# Altium PCB PCB1.PcbDoc (part 2 of 3)
Units mil, origin at the board's own origin, x right, y up, seen from the top; angles counter-clockwise.
Board outline 8430 x 1950 mil, 4 copper layers (Top Layer, VCC, GND, Bottom Layer); 357 components, 242 nets, 1572 pads, 599 vias.
Unrouted connection lines stored in the file: 1.
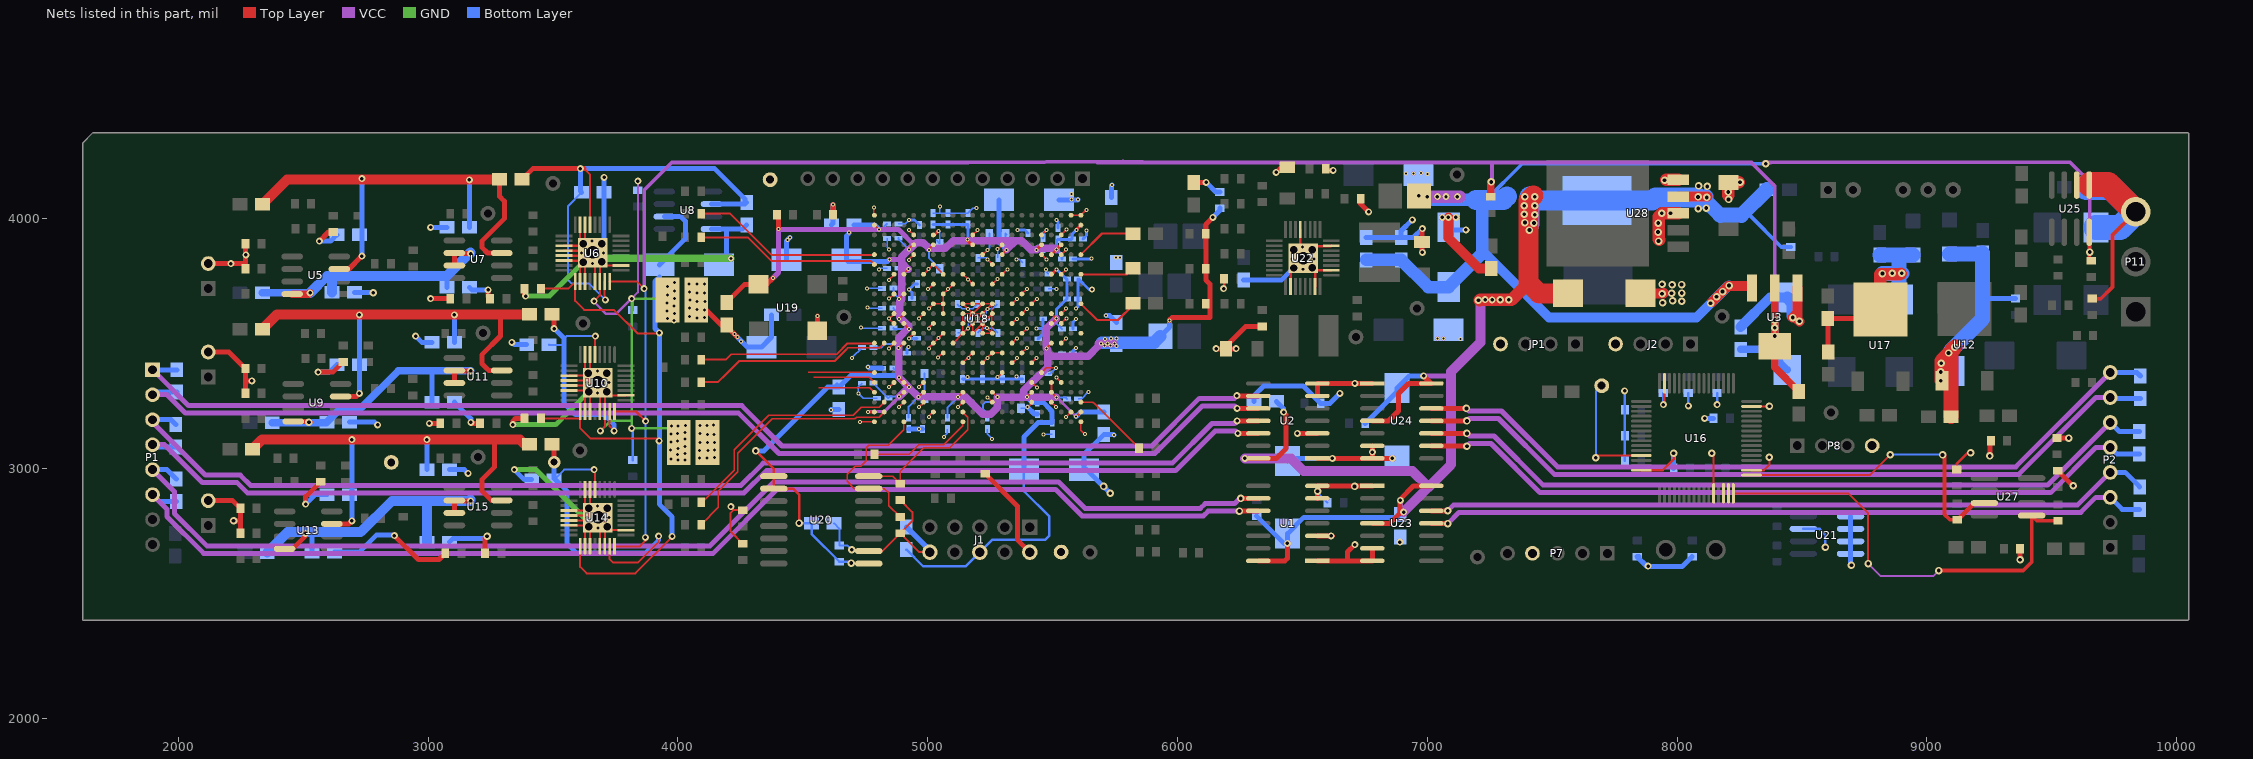
[diagram p4: the nets of this part, all layers, seen from the top]

## Via types
v1: diameter 16, hole 8, Top Layer to Bottom Layer, 223 vias
v2: diameter 30, hole 15, Top Layer to Bottom Layer, 157 vias
v3: diameter 28, hole 14, Top Layer to Bottom Layer, 154 vias
v4: diameter 24, hole 12, Top Layer to Bottom Layer, 60 vias
v5: diameter 196.85, hole 118.11, Top Layer to Bottom Layer, 4 vias
v6: diameter 50, hole 28, Top Layer to Bottom Layer, 1 vias

## Nets (pads, with @x,y where several pads share a name; then routed paths per layer and width w, separated by ;. In a path a pad name is that pad's centre, name@x,y a point inside that pad or via, vN(x,y) a via of type N, cw(c..) or ccw(c..) an arc to the next point about the centre after c; other vN are vias at no path point) (continued)
+3.3V: C39.2 C40.2 C54.2 C55.2 C56.2 C57.2 C60.2 C61.2 C62.2 C63.2 C64.2 C65.2 C66.2 C67.2 C68.2 C69.2 C70.2 C71.2 C72.2 C73.2 C74.2 C118.1 C119.1 C120.2 C121.2 C122.2 C123.2 C124.2 C125.2 C126.2 C127.2 C128.2 C129.2 C130.2 C131.2 C132.2 C133.2 C134.2 C135.1 J1.6 J5.2 R81.1 R82.1 R83.2 R84.2 R133.2 R134.2 R135.2 R136.2 U18.A2 U18.A21 U18.AB2 U18.AB21 U18.D4 U18.D5 U18.D9 U18.D11 U18.D12 U18.D14 U18.D16 U18.E19 U18.F4 U18.G19 U18.K4 U18.L19 U18.N4 U18.P18 U18.U4 U18.V19 U18.W4 U18.W5 U18.W9 U18.W11 U18.W12 U18.W16 U18.W18 U18.Y19 U19.4 U20.1 U20.2 U20.9 | length 11952.2
  Top Layer w8: U18.A21@4786.61,3974.02 4803.63,3957 v1(4805,3957) ; v1(4884,3483) 4902.57,3501.57 U18.D9@4904.72,3501.57 ; v1(4885,3364) 4885,3363 4886,3362 4886.82,3362 U18.D5@4904.72,3344.09 4923.82,3325 v1(4925,3325) ; v1(4886,3287) 4887,3287 U18.D4@4904.72,3304.72 ; v1(4886,3599) 4904.72,3617.72 U18.D12@4904.72,3619.69 ; v1(4886,3679) 4886,3679.7 U18.D14@4904.72,3698.43 ; U18.D11@4904.72,3580.32 4904.72,3578.28 4925,3558 v1(4925,3559) ; U18.D16@4904.72,3777.17 4904.72,3779.72 v1(4923,3798) ; v1(4926,3876) 4926,3877 4924,3879 4940.28,3895.28 U18.E19@4944.09,3895.28 ; v1(4963,3286) 4981.72,3304.72 U18.F4@4983.46,3304.72 ; v1(5005,3875) 5005,3877.44 U18.G19@5022.83,3895.28 ; v1(5122,3286) 5122.22,3286 U18.K4@5140.94,3304.72 ; U18.N4@5259.06,3304.72 5261.28,3304.72 5279,3287 v1(5279,3285) ; U18.P18@5298.43,3855.91 5315,3872.48 v1(5315,3875) ; v1(5397,3285) 5397,3285.19 U18.U4@5416.54,3304.72 ; v1(5475,3481) 5475,3481.3 U18.W9@5495.28,3501.57 ; U18.W5@5495.28,3344.09 U18.W4@5495.28,3304.72 5515,3285 v1(5515,3284) ; U18.W11@5495.28,3580.32 5497.32,3580.32 5515,3598 v1(5515,3600) ; U18.W12@5495.28,3619.69 v1(5515,3600)
  Top Layer w10: v2(4312,3070) 4384.04,2997.96 U20.1@4384.04,2969 U20.2@4384.04,2919 4461,2919 4485,2895 v2(4485,2781)
  Top Layer w12: v1(4761,3226) U18.A2@4786.61,3225.98 ; v1(5160,3916) 5160,3911 5175.72,3895.28 U18.L19@5180.31,3895.28 ; v1(5436,3875) 5436,3875.37 U18.V19@5455.91,3895.28 ; U18.W16@5495.28,3780.72 U18.W16@5495.28,3777.17 5497.17,3777.17 5516,3796 v1(5516,3797) ; U18.W18@5495.28,3855.91 v1(5515.69,3876.32) U18.Y19@5534.65,3895.28 ; v1(5594,3208) 5595.4,3208 U18.AB2@5613.39,3225.98 ; v1(5595,3954) 5595,3955.63 U18.AB21@5613.39,3974.02
  Top Layer w20: C54.2@4195.06,3664.92 4267.03,3736.9 U19.4@4322.37,3736.9 4355.9,3736.9 v1(4381,3762) ; R136.2@4396.54,4015 4403,4008.54 v1(4403,3959) ; v1(5968,3592) 5968,3594 5979,3605 6130,3605 6130,3737.43 6113.46,3753.96 R135.2@6113.46,3940 6113.46,3976.46 v3(6142,4005)
  VCC w8: v1(4805,3957) 4848,3957 4883,3957
  VCC w12: v1(4761,3226) 4762,3227 4826,3227 v1(4886,3287) ; v1(5515,3284) 5518,3284 v1(5594,3208)
  VCC w20: v1(4381,3762) 4403,3784 v1(4403,3959) 4405,3957 v1(4805,3957) 4883,3957 4895,3945 4936,3904 4953.99,3904 ; v1(4686,3945) 4686,3957 ; v1(4847,3837) 4881.99,3837 4896,3822.99
  VCC w30: v1(4886,3287) 4887,3287 v1(4925,3325) ; v1(4923,3798) 4920.99,3798 4896,3822.99 ; v1@5005,3881 v1@5006,3881 ; v1(5315,3875) 5352,3912 ; v1(5436,3875) 5413,3875 5376,3912 5352,3912 ; v1@5436.38,3875.38 5443,3882 5510,3882 v1(5515.69,3876.32) ; v1(5515,3284) 5514,3285 v1(5397,3285) 5384,3285 ; v1(5515,3600) 5475,3560 v1(5475,3481) 5480,3476 5480,3448 ; v1(5747,3501) 5732,3501 v1(5720,3501) v1(5693,3501) 5685,3501 5683,3499 5683,3490 5642,3449 5481,3449 5480,3448 ; 4896,3822.99 4896,3678 4888,3670 4888,3606 4922,3572 4925,3572 4925,3564 4884,3523 v1(4884,3483) 4884,3366 v1(4925,3325) ; 4896,3822.99 4896,3847.01 4924.99,3876 v1(4926,3876) 4953.99,3904 4983,3904 v1@5006,3881 ; v1(4925,3325) 4925,3323.99 v1(4963,3286) v1(5122,3286) 5151.1,3286 5221.1,3216 5252.01,3216 5279,3242.99 v1(5279,3285) 5384,3285 ; v1@5006,3881 5022,3881 5071,3881 5098,3908 5098,3908.23 5101.77,3912 5352,3912 ; 5384,3285 5384,3312.01 5424.99,3353 5427.08,3353 5480,3405.92 5480,3448
  Bottom Layer w8: C67.2@4782.83,3341.39 C56.2@4842.83,3281.39 4848.44,3287 v1(4886,3287) ; C121.2@4782.83,3484.12 4813.12,3484.12 4827,3498 4869,3498 v1(4884,3483) ; v1(4805,3957) 4815.56,3957 C68.2@4837.17,3978.61 ; C57.2@4862.83,3401.39 4885,3379.23 v1(4885,3364) ; C60.2@4862.83,3561.39 4865.23,3559 v1(4925,3559) ; C62.2@4862.83,3641.39 4886,3618.23 v1(4886,3599) ; C63.2@4862.83,3721.39 4862.83,3702.17 v1(4886,3679) ; C64.2@4882.83,3801.39 4886.23,3798 v1(4923,3798) ; C61.2@4882.83,3921.39 4882.83,3919.17 v1(4926,3876) ; C70.2@4923.86,3202.83 4923.86,3246.86 v1(4963,3286) 4952,3297 4952,3298 ; v1(4925,3325) 4952,3298 ; R84.2@4986.54,3380 R83.2@4986.54,3280 4970,3280 4952,3298 ; v1(5005,3875) 5005,3843.5 R81.1@5048.5,3800 ; C132.2@5078.61,3202.83 5078.61,3242.61 v1(5122,3286) ; C130.2@5238.61,3202.83 5238.61,3220.94 5222,3237.54 5222,3253 5221,3254 5233,3266 5260,3266 v1(5279,3285) ; R82.1@5315,3936.5 R82.1@5311.5,3940 5311.5,3878.5 v1(5315,3875) 5318.44,3878.44 5318.44,3917.79 ; v1(5397,3285) 5416.44,3285 C131.2@5438.61,3262.83 5464.17,3262.83 5498.61,3228.39 C69.2@5498.61,3182.83 ; v1(5475,3481) 5497.39,3458.61 C129.2@5537.17,3458.61 ; v1(5515,3284) 5551.77,3284 C120.2@5557.17,3278.61 ; v1(5515,3600) 5515,3580.77 C127.2@5537.17,3558.61
  Bottom Layer w10: v2(4485,2781) 4486.06,2779.94 C126.2@4535.08,2779.94 4535.08,2737.46 C40.2@4646,2626.54 4688.46,2626.54 v2(4694,2621) ; C128.2@4915.06,2675.08 4982.14,2608 5152,2608 J1.6@5209,2665 5259,2715 5471,2715 5487,2731 5487,2807 5385.43,2908.57 C119.1@5385.43,2994.64
  Bottom Layer w12: C133.2@5021.39,3977.17 C66.2@5161.39,3977.17 5161.39,3917.39 v1(5160,3916) ; v1(5436,3875) 5459.23,3875 C72.2@5461.39,3877.17 ; v1(5515,3600) 5515,3636.44 C65.2@5557.17,3678.61 C55.2@5557.17,3758.61 5554.39,3758.61 v1(5516,3797) ; C73.2@5537.17,3838.61 5537.17,3854.83 v1(5515.69,3876.32) 5515.69,3911.46 C74.2@5521.39,3917.17 5575.73,3917.17 C134.2@5577.17,3918.61 5577.17,3936.17 v1(5595,3954)
  Bottom Layer w20: v2(4312,3070) 4344,3070 4598.92,3324.92 C122.2@4644.94,3324.92 ; C122.2@4636.4,3333.46 C122.2@4644.94,3324.92 ; v1(4686,3945) 4684,3943 4684,3940 4674.57,3930.57 C118.1@4674.57,3835.36 4680.94,3829 4839,3829 v1(4847,3837) ; C125.2@4704.92,3975.06 4786.94,3975.06 v1(4805,3957) ; v1(4925,3325) 4920,3325 4874,3371 4691.02,3371 C122.2@4644.94,3324.92 ; C135.1@5285.43,4074.64 5285.43,3906.52 5315,3876.94 v1(5315,3875) ; C119.1@5385.43,2994.64 5385.43,3126.43 5441.83,3182.83 C69.2@5498.61,3182.83 5498.61,3227.45 5490,3236.06 5490,3237 5464.17,3262.83 5419.17,3262.83 v1(5397,3285) ; v1(5594,3208) 5610.92,3224.92 C124.2@5704.94,3224.92 ; J5.2@5931.71,3529.23 5968,3565.52 v1(5968,3592) ; v3(6142,4005) 6170,4033 C39.2@6170,4041.54
  Bottom Layer w50: v1@5697,3504 5732,3504 5906.48,3504 J5.2@5931.71,3529.23
  other v1: 5756,3490 5708,3492 5732,3492 5710,3519 5733,3520 5755,3520
+3.3V_AD: C6.1 C7.1 R6.2 R127.2 U3.2 U3.4 U6.24 U10.24 U14.24 | length 8316.8
  Top Layer w8: U6.24@3726.72,3747.81 3837.19,3747.81 v3(3865,3720) ; U14.24@3746.72,2687.81 3753,2687.81 3847.81,2687.81 ; U10.24@3746.72,3227.81 3832.19,3227.81 v3(3871,3189) v3@3871,3191 ; 3855,2695 3847.81,2687.81 ; v3(3870,2724) 3870,2710 3847.81,2687.81
  Top Layer w30: R127.2@7255,4087.46 7255,4146 v2(7256,4147) ; U3.4@8391,3511 U3.4@8391,3489.86 ; U3.2@8391,3722.14 v2(8391,3594) v2(8391,3563) v2(8391,3530) U3.4@8391,3489.86 ; R6.2@8487.98,3307.92 8391,3404.9 U3.4@8391,3489.86
  VCC w15: v3(3865,3720) 3865,4115 3975.03,4225.03 5154.97,4225.03 ; 5155,4225 5161.32,4225 ; 5161.35,4225.03 5782,4229.03 5944.97,4225.03 ; 5680,4225 7259,4225 ; v2(7256,4147) 7259,4150 7259,4225 ; 8277,4225 8297,4225 ; 8298,4225 8297,4225 ; v2(8391,3530) v2(8391,3563) v2(8391,3594) 8391,4131 8297,4225 ; 7259,4225 8297,4225
  Bottom Layer w8: v3(3865,3720) 3870,3715 v3(3870,2724) ; v3@3870,2720 v3(3870,2724) ; v3@3870,2723 v3(3870,2724)
  Bottom Layer w30: C7.1@8254.94,3476.92 8256.02,3478 8391,3478 ; v2(8391,3594) v2(8391,3563) v2(8391,3530) 8391,3478 ; C6.1@8442,3394 8391,3445 8391,3478
+5V1: C13.2 C92.1 R60.1 R61.2 U5.7 U7.3 | length 2009.7
  Top Layer w20: U5.7@2644.49,3798 2683,3798 v3(2735,3850) ; R61.2@3286.08,4156.98 3286.08,4088.92 3305,4070 3305,4000 3215,3910 3215,3885 3238,3862 U7.3@3294.49,3862
  Top Layer w40: R60.1@2336.08,4056.98 2436.08,4156.98 R61.2@3286.08,4156.98
  Bottom Layer w20: v3(2735,3850) v3(2735,4160) ; v3(3165,4155) 3165.08,4154.92 C92.1@3165.08,3964.94
+5V2: C22.2 C158.1 R62.1 R63.2 U9.7 U11.3 | length 1919.6
  Top Layer w20: U9.7@2649.49,3288 2713,3288 v3(2725,3300) ; 3290,3616.98 3290,3530 3215,3455 3215,3420 3243,3392 U11.3@3294.49,3392
  Top Layer w40: R62.1@2336.08,3556.98 2396.08,3616.98 3290,3616.98 R63.2@3406.08,3616.98
  Bottom Layer w20: v3(2725,3300) v3(2725,3615) ; v3(3105,3615) 3105.08,3614.92 C158.1@3105.08,3504.94
+5V3: C31.2 C160.1 R64.1 R65.2 U13.7 U15.3 | length 1994.4
  Top Layer w20: U13.7@2614.49,2778 2683,2778 v3(2695,2790) ; 3265,3115 3265,3005 3215,2955 3215,2910 3253,2872 U15.3@3294.49,2872
  Top Layer w40: R64.1@2296.08,3076.98 2334.1,3115 3265,3115 3368.06,3115 3388.06,3095 R65.2@3415,3095
  Bottom Layer w20: v3(2695,2790) v3(2695,3115) ; C160.1@2994.92,2995.06 2994.92,3114.92 v3(2995,3115)
+5V_485: C1.2 C2.2 C3.1 C4.1 C155.1 L3.2 R5.2 R25.2 R59.1 R124.1 R126.2 U1.14 U2.14 U23.4 U23.14 U24.4 U24.14 U28.4 | length 9571.5
  Top Layer w20: v3(6270,3040) U2.14@6323.78,3040 6395,3040 6435,3080 6435,3215 v3(6425,3225) ; U1.14@6323.78,2630 6430,2630 6440,2640 v3(6440,2700) ; U23.4@6780,2780 6850,2780 6890,2820 ; U24.4@6780,3190 6845,3190 6885,3230 6885,3300 6925,3340 U24.14@7015,3340 ; 6890,2825 6890,2875 6945,2930 U23.14@7016.22,2930 ; v3(6985,3370) U24.14@7015,3340 ; U24.14@7016.22,3340 U24.14@7015,3340 ; v3@7230,3675 7337,3675 7405,3743
  Top Layer w40: U28.4@8005,4088.07 v2@8122.07,4088.07
  Top Layer w50: v2@7211,3674 7212,3675 7337,3675 7405,3743
  Top Layer w80: v2@7425,4093 7405,4073 7405,3743 7447,3701 C155.1@7563,3701
  VCC w20: v3(6270,3040) 6455,3040 6505,2990 6940,2990 7005,2925 ; v3(6905,2825) 7005,2925 ; v3(6985,3370) 7095,3370 7095,3015 7005,2925 ; v2@7213,3675 v3@7230,3675
  VCC w40: v3(6270,3040) 6455,3040 6505,2990 6940,2990 7005,2925 ; v3(6905,2825) 7095,3015 7095,3387 7213,3505 7213,3675 v2@7335,3675
  Bottom Layer w15: 8253.06,4014 8290,4014 8417.46,3886.54 R126.2@8456,3886.54
  Bottom Layer w20: R59.1@6317,2808.5 6425.5,2700 v3(6440,2700) 6440,2738 C3.1@6441,2739 6506,2804 6879.92,2804 C1.2@6891.92,2816 ; C2.2@6396,3268.08 6425,3239.08 v3(6425,3225) ; R124.1@6751.5,3180 6879,3307.5 C4.1@6879,3321 6928,3370 v3(6985,3370) ; C1.2@6890,2825 6890,2817.92 C1.2@6891.92,2816 ; v3(6891.92,2872.08) C1.2@6891.92,2816
  Bottom Layer w30: v3@7230,3675 v3(7260,3675)
  Bottom Layer w40: R5.2@7408.92,4088.98 7425.16,4072.74 L3.2@7679,4072.74 7694.26,4088 8030,4088 ; L3.2@7803.26,4089 L3.2@7802.26,4088 ; v2@8121,4083 v2@8116,4088 ; L3.2@7802.26,4088 7790,4075.74 7903.74,4075.74 7916,4088 8030,4088 ; L3.2@7802.26,4088 v2@8116,4088 ; 8030,4088 v2@8116,4088
  Bottom Layer w60: v2@8109,4077 8173,4013 ; 8116,4064 v2@8116,4088 ; 8169,4014 8253.06,4014 ; 8257.06,4013 R25.2@8360.08,4116.02
  Bottom Layer w80: 7408,3978 7408.92,3978.92 R5.2@7408.92,4088.98 7425.16,4072.74 L3.2@7679,4072.74 7901.64,4072.74 7913.05,4084.14 v2@8081.14,4084.14
  other v2: 7205,3673 7292,3675 7326,3675 7409,3954 7427,3982 7391,3984 7430,4015 7388,4017 8085,4040 8117,4042 7388,4052 7430,4052 8119,4085 8084,4087 7391,4088 7430,4088 8121,4129 8086,4131
  other v3: 7232,3676
+5V_D: C91.1 C93.2 C94.2 C148.2 J4.1 R5.1 U3.3 U25.8 | length 5903.5
  Top Layer w10: U25.8@9650,3945.51 9650,3839.46 C148.2@9658,3831.46
  Top Layer w15: U25.8@9650,3945.51 9650,3839.46 C148.2@9658,3831.46
  Top Layer w40: v2@8140,3666 8204,3730 8292.59,3730 U3.3@8300.45,3722.14
  VCC w15: v2@8350,4225 8351,4226 8402,4226 ; 8374,4225 8375,4226 8402,4226 ; v2(9652,3866) 9652,4147 9573,4226 8402,4226
  VCC w50: v3@6960,4085 6963,4088 v3(7121,4088) ; v3@7120,4087 v3(7121,4088) ; v3@7121.99,4086.87 7131,4087 v3(7121,4088)
  Bottom Layer w15: 7235,4075 7380,4220 v2(8355,4220)
  Bottom Layer w40: 7220,3860.06 7230.94,3860.06 7487,3604 8078,3604 v2@8207,3733
  Bottom Layer w50: C93.2@6755.06,3835.08 C94.2@6895.06,3835.08 7004.71,3725.43 C91.1@7085.36,3725.43 7220,3860.06 7220,4050 7195,4075 6982.44,4075 v3(6966.67,4090.77) ; 7156,4075 7304.94,4075 R5.1@7318.92,4088.98
  Bottom Layer w80: 7195,4075 7304.94,4075 R5.1@7318.92,4088.98
  other v2: 8134,3661 8158,3687 8182.06,3708.06 8208,3732
  other v3: 7000,4088 7040,4088 7075,4088
+5VA: C9.2 C15.1 R61.1 U6.5 U6.23 U8.2 | length 2100.2
  Top Layer w8: 3625,4200 3647.98,4177.02 U6.5@3647.98,3975.76 ; U6.23@3707.03,3747.81 3707.03,3677.97 v3(3710,3675)
  Top Layer w20: R61.1@3376.08,4156.98 3419.1,4200 v3(3610,4200) 3625,4200
  Bottom Layer w8: C9.2@3615.08,4104.94 3560,4049.86 3560,3755 3575,3740 3645,3740 v3(3710,3675)
  Bottom Layer w20: C9.2@3615.08,4104.94 3610,4110.02 v3(3610,4200) 4147,4200 4267.98,4079.02 C15.1@4267.98,4058 ; U8.2@4134.49,4058 C15.1@4267.98,4058 ; C15.1@4275.06,4065.08 C15.1@4267.98,4058
+5VB: C18.2 R63.1 U10.5 U10.23 | length 997.2
  Top Layer w8: U10.5@3667.98,3455.76 3667.98,3527.98 v3(3670,3530) ; U10.23@3727.03,3227.81 3727.03,3167.97 v3(3745,3150)
  Top Layer w20: R63.1@3496.08,3616.98 3505,3608.06 v3(3505,3560)
  Bottom Layer w8: C18.2@3484.92,3495.06 3484.98,3495 3545,3495 ; 3545,3520 3555,3530 v3(3670,3530) v3@3680.14,3530
  Bottom Layer w20: v3(3505,3560) 3545,3520 3545,3495 3545,3260 3590,3215 3705,3215 3745,3175 v3(3745,3150)
+5VC: C27.2 R65.1 U14.5 U14.23 | length 1409.3
  Top Layer w8: v3(3665,2995) 3667.98,2992.02 U14.5@3667.98,2915.76 ; U14.23@3727.03,2687.81 3727.03,2636.97 3741,2623 3840,2623 3923,2706 v3(3923,2729)
  Top Layer w20: R65.1@3496.08,3096.98 3505,3088.06 v6(3505,3025)
  Bottom Layer w8: C27.2@3504.92,2955.06 3544.86,2995 v3(3665,2995)
  Bottom Layer w20: v6(3505,3025) 3505,2960 3507.43,2957.57 3555.08,2909.92 3555.08,2699.92 3593,2662 3872,2662 3923,2713 v3(3923,2729)
+9V: C5.1 C33.1 C45.1 L4.2 R8.2 U12.1 | length 1219.8
  Top Layer w60: U12.1@9060.33,3351.05 9060.33,3430.33 v2@9106,3476 ; C33.1@9096.08,3207.06 9096.08,3470.08 v2(9112,3486)
  Bottom Layer w20: 9222.94,3680 9223.48,3679.46 R8.2@9355,3679.46
  Bottom Layer w60: L4.2@9091,3859 9220.02,3859 C5.1@9222.94,3861.92 9222.94,3597.94 9095,3470 C45.1@9095,3390
  other v2: 9056,3351 9056,3386 9058,3421 9087,3462
+12V: C8.1 C38.1 P11.3 R110.2 U25.1 U25.2 | length 1089
  Top Layer w15: R110.2@9663,3679.46 9696.46,3679.46 9743,3726 9743,3934 P11.3@9836,4027
  Top Layer w100: U25.1@9652.51,4137 9726,4137 P11.3@9836,4027
  Bottom Layer w100: C38.1@9640.08,4124.94 9738.06,4124.94 P11.3@9836,4027 9774,3965 C8.1@9677,3965
+VREFA: C17.1 C26.1 C35.1 U6.17 U8.6 U10.17 U14.17 | length 3084.5
  Top Layer w8: C35.1@3451.5,3200 U10.17@3608.92,3200 ; C26.1@3451.5,3720 3561.11,3720 U6.17@3588.92,3747.81 3588.92,3671.08 3625,3635 3744,3635 3839,3540 3922.43,3540 v3(3925.43,3543) ; U14.17@3608.92,2687.81 3608.92,2606.08 3635,2580 3830,2580 v3@3977,2727 ; U10.17@3608.92,3227.81 U10.17@3608.92,3200 ; v3(3925,3110) 3915,3120 3650,3120 3608.92,3161.08 U10.17@3608.92,3200
  Bottom Layer w20: 3925.43,3765.43 3908,3748 3908,3560.43 v3(3925.43,3543) 3925.43,2857 3977,2805.43 v3(3977,2728) ; C17.1@3925.43,3814.64 4030,3919.21 4030,3990 4012,4008 U8.6@3945.51,4008
-5V1: C14.2 C157.2 R69.1 U5.4 U7.6 U7.7 | length 1217.9
  Top Layer w20: U7.7@3105.51,3812 U7.6@3105.51,3862 3107.51,3860 v3(3170,3860)
  Top Layer w30: U5.4@2455.51,3698 2523,3698 v3(2528.02,3703.02)
  Bottom Layer w20: 2480,3703.02 2484.92,3707.94 ; 3075,3770 3075.08,3769.92 C157.2@3075.08,3724.94
  Bottom Layer w30: R69.1@2336.08,3703.02 2480,3703.02 v3(2528.02,3703.02) v3@2530,3705
  Bottom Layer w40: v3(2528.02,3703.02) 2595,3770 2620,3770 ; C14.2@2615.08,3704.94 2615.08,3765.08 2620,3770 ; v3(3170,3860) 3170,3865 3075,3770 2620,3770
-5V2: C23.2 C159.2 R71.1 U9.4 U11.6 U11.7 | length 1224.6
  Top Layer w20: U9.4@2460.51,3188 2527,3188 v2@2530,3185 ; U11.7@3074,3342 U11.7@3105.51,3342 U11.6@3105.51,3392 3107.51,3390 v3(3170,3390)
  Bottom Layer w20: 3010,3390 3015.08,3384.92 C159.2@3015.08,3264.94
  Bottom Layer w30: R71.1@2376.08,3183.02 2593.16,3183.02 C23.2@2595.08,3184.94 2630.08,3219.94 2630.08,3220.3 2654.78,3245 2735,3245 2880,3390 3010,3390 v3(3170,3390)
  other v2: 2523,3185
-5V3: C32.2 C161.2 R72.1 U13.4 U15.6 U15.7 | length 1414.4
  Top Layer w20: U13.4@2425.51,2678 2458,2678 2510,2730 v3(2510,2740) ; U15.7@3071.46,2822 U15.7@3105.51,2822 U15.6@3105.51,2872 3107.51,2870 v3(3170,2870)
  Bottom Layer w20: C32.2@2535.08,2664.94 2535.08,2740.08 2540,2745
  Bottom Layer w40: R72.1@2356.08,2663.02 2438.06,2745 2540,2745 2730,2745 2855,2870 v3@3165,2870 ; C161.2@2995.08,2704.94 2995.08,2860.08 ; v3@3165,2870 v3(3170,2870) 3170,2875 v3@3165,2870
-9V: C36.2 C46.2 C84.1 D5.2 L5.2 U17.2 | length 971.4
  Top Layer w20: C36.2@8605.06,3466.92 8605.06,3598.51 D5.2@8603.64,3599.92 8777.35,3599.92 U17.2@8813.88,3636.45
  Top Layer w50: U17.2@8813.88,3636.45 8813.88,3777.12 8892.12,3777.12 v2@8895,3780
  Bottom Layer w60: C84.1@8811.94,3853.92 8942.92,3853.92 L5.2@8944,3855 ; v2@8823,3781 v2(8900,3781) ; C46.2@8889,3676 8889,3848.92 8894,3853.92
  other v2: 8822,3780 8861,3781
ADC_IN0: U16.14
ADC_IN1: U16.15
ADC_IN2: R116.2 U16.16 U27.1 | length 1777.4
  Top Layer w8: U16.16@8226.5,2900 U16.16@8225.28,2900 8686,2900 8765,2821 v2(8765,2619)
  Top Layer w15: v2@9045,2591 9386,2591 9419.49,2624.49 U27.1@9419.49,2811 9439.95,2790.54 R116.2@9525,2790.54
  VCC w8: v2(8765,2619) 8815,2569 9026,2569 v2(9048,2591)
  other v2: 9048,2591
ADC_IN3: R120.2 U16.17 U27.7 | length 1463.3
  Top Layer w8: U16.17@8298.11,2972.61 8341.79,2972.61 8342.01,2972.84 ; v2@8854,3055 8771.84,2972.84 8342.01,2972.84 ; 8342.01,2972.84 8342.07,2972.9 8298.17,2972.9 U16.17@8298.11,2972.84 8342.01,2972.84
  Top Layer w10: R120.2@9121,2794.54 9130.54,2794.54 9197,2861 U27.7@9230.51,2861
  Top Layer w15: v2@9064,3055 9071,3048 9071,2816 9092.46,2794.54 R120.2@9121,2794.54 9187.46,2861 U27.7@9230.51,2861
  Bottom Layer w8: v2(8853,3055) 9022,3055 9031,3055 9062,3055 v2(9063,3054)
AGND: C9.1 C11.2 C13.1 C14.1 C15.2 C17.2 C18.1 C20.2 C22.1 C23.1 C26.2 C27.1 C29.2 C31.1 C32.1 C35.2 C92.2 C157.1 C158.2 C159.1 C160.2 C161.1 pad.0@3622,3826 pad.0@3643,3306 pad.0@3644,2766 pad.0@3659,3865 pad.0@3680,3345 pad.0@3681,2805 pad.1@3694.39,3826.55 pad.1@3715.39,3306.55 pad.1@3716.39,2766.55 pad.2@3621,3900 pad.2@3642,3380 pad.2@3643,2840 pad.3@3695,3900 pad.3@3716,3380 pad.3@3717,2840 pad.4@3615,3863 pad.4@3636,3343 pad.4@3637,2803 pad.5@3658,3821 pad.5@3679,3301 pad.5@3680,2761 pad.6@3703,3863 pad.6@3724,3343 pad.6@3725,2803 pad.7@3657,3910 pad.7@3678,3390 pad.7@3679,2850 R7.1 R12.1 R13.1 R15.1 R19.2 R20.1 R29.1 R30.1 R32.1 R36.2 R37.1 R46.1 R47.1 R49.1 R53.2 R54.1 R68.1 S1.2 S2.2 S3.2 T7.1 U6.6 U6.7 U6.11 U6.12 U6.13 U6.14 U6.18 U6.19 U6.21 U6.22 U6.26 U6.33 U8.4 U10.6 U10.7 U10.11 U10.12 U10.13 U10.14 U10.18 U10.19 U10.21 U10.22 U10.26 U10.33 U14.6 U14.7 U14.11 U14.12 U14.13 U14.14 U14.18 U14.19 U14.21 U14.22 U14.26 U14.33 | length 11387
  Top Layer w8: U14.14@3563.65,2772.26 pad.0@3647.75,2772.26 ; U14.13@3563.65,2791.94 3667.43,2791.94 U14.33@3678.72,2803.23 ; U14.12@3563.65,2811.63 3670.31,2811.63 U14.33@3678.72,2803.23 ; U14.11@3563.65,2831.31 pad.2@3650.63,2831.31 ; U10.14@3563.65,3312.26 pad.0@3647.75,3312.26 ; U10.13@3563.65,3331.94 3667.43,3331.94 U10.33@3678.72,3343.23 ; U10.12@3563.65,3351.63 3670.31,3351.63 U10.33@3678.72,3343.23 ; U10.11@3563.65,3371.31 3650.63,3371.31 U10.33@3678.72,3343.23 ; U6.18@3608.61,3747.81 3608.61,3813.12 pad.0@3628.29,3832.8 ; U6.7@3608.61,3975.76 pad.2@3608.61,3913.34 ; pad.0@3627.75,3832.26 pad.0@3628.29,3832.8 ; U6.19@3628.29,3747.81 pad.0@3628.29,3832.8 ; U6.6@3628.29,3975.76 pad.2@3628.29,3893.65 ; U14.18@3628.61,2687.81 U14.33@3628.61,2753.12 ; U14.7@3628.61,2915.76 3628.61,2853.34 3648.29,2833.65 U14.6@3648.29,2915.76 ; U10.18@3628.61,3227.81 3628.61,3293.12 U10.33@3678.72,3343.23 ; U10.7@3628.61,3455.76 pad.2@3628.61,3393.34 ; pad.0@3647.43,3851.94 U6.33@3658.72,3863.23 ; U14.19@3648.29,2687.81 pad.0@3648.29,2772.8 ; U10.19@3648.29,3227.81 3648.29,3312.8 U10.33@3678.72,3343.23 ; U10.6@3648.29,3455.76 3648.29,3373.65 pad.2@3628.61,3393.34 ; pad.0@3650.31,3871.63 U6.33@3658.72,3863.23 ; v3(3665,3670) 3687.35,3692.35 3687.35,3834.6 U6.33@3658.72,3863.23 ; U6.21@3667.66,3747.81 3667.66,3854.28 U6.33@3658.72,3863.23 ; pad.0@3681,2805 3707.35,2778.65 3707.35,2774.6 U14.22@3707.35,2687.81 ; U14.21@3687.66,2687.81 3687.49,2687.98 3687.49,2794.46 3678.97,2802.97 U14.33@3678.72,2803.23 ; U10.21@3687.66,3227.81 3687.66,3334.28 U10.33@3678.72,3343.23 ; v3(3690,3150) 3707.35,3167.35 3707.35,3314.6 U10.33@3678.72,3343.23 ; pad.1@3729.37,2752.57 U14.26@3791.99,2752.57 ; U6.26@3771.99,3812.57 3709.37,3812.57 U6.33@3658.72,3863.23 ; U10.26@3791.99,3292.57 3729.37,3292.57 U10.33@3678.72,3343.23 ; pad.2@3608.61,3913.34 U6.33@3658.72,3863.23 ; pad.2@3608.61,3913.34 pad.2@3628.29,3893.65 ; pad.0@3628.29,3832.8 U6.33@3658.72,3863.23 ; pad.2@3628.29,3893.65 U6.33@3658.72,3863.23 ; pad.2@3628.61,3393.34 U10.33@3678.72,3343.23
  Top Layer w10: U6.14@3543.65,3832.26 3627.75,3832.26 U6.33@3658.72,3863.23 3630.63,3891.31 U6.11@3543.65,3891.31 ; U6.13@3543.65,3851.94 pad.0@3647.43,3851.94 ; U6.12@3543.65,3871.63 pad.0@3650.31,3871.63
  Top Layer w20: S3.2@2120,2871 2217.5,2871 R47.1@2248.5,2840 2248.5,2837 2248,2837 2248,2790 ; S2.2@2120,3466 2202.5,3466 R30.1@2268.5,3400 2268.5,3350 ; S1.2@2120,3820 2268.5,3820 ; v2@2215,2790 v2(2221,2790) 2248,2790 ; R54.1@2248.5,2740 2248,2740 2248,2790 ; R37.1@2268.5,3300 2268.5,3350 ; R20.1@2268.5,3800 2268.5,3820 ; R13.1@2268.5,3900 2268.5,3820 ; v3(2295,3350) 2268.5,3350 ; v3(2510,2857) 2510,2886.54 C29.2@2570,2946.54 ; v3(2560,3385) 2618.46,3385 C20.2@2660,3426.54 ; v3(2565,3910) 2601.54,3946.54 C11.2@2620,3946.54 ; v3(2865,2731) 2961,2635 2998,2635 ; 2985,2635 2998,2635 ; v3(3005,3180) R29.1@3048.5,3180 ; v3(3010,3680) R12.1@3088.5,3680 ; R46.1@3068.5,2660 3043.5,2635 2998,2635 ; v3(3171,3184) 3175,3180 R32.1@3208.5,3180 ; R49.1@3228.5,2660 3228.5,2720.5 v2(3236,2728) ; v3(3240,3715) 3240,3688.5 R15.1@3248.5,3680 ; v3(3339,3175) 3339,3189 3350,3200 C35.2@3386.54,3200 ; C26.2@3386.54,3720 3386.54,3693.46 v3(3390,3690)
  VCC w8: v3(3815,3680) 3840,3705 v3(3840,4150)
  VCC w10: v3(3665,3670) 3665,3666 3711,3620 3755,3620 v3(3815,3680)
  GND w10: v3(3665,3670) v3@3665,3671.01 ; v3(3690,3150) 3730,3190 3815,3190 ; v4(3958,3694) 3944,3680 v3(3815,3680) 3815,3190 ; v4(3974,3169) 3965,3160 v3(3815,3160) 3815,3190
  GND w20: v3(3345,2995) 3432,2995 3623.77,2803.23 U14.33@3678.72,2803.23 ; v3@3350,3175 3510.49,3175 U10.33@3678.72,3343.23 ; v3(3390,3690) 3485.49,3690 U6.33@3658.72,3863.23 ; v4@4210,3839 v4(4212,3841)
  GND w30: U6.33@3658.72,3863.23 3680.94,3841 v4(4212,3841)
  Bottom Layer w8: R19.2@3840,4113.46 v3(3840,4150)
  Bottom Layer w10: v3(3815,3160) 3820,3155 R53.2@3820,3033.46 ; v3(3815,3680) 3820,3675 R36.2@3820,3633.46
  Bottom Layer w20: v3(2510,2857) 2548,2895 ; 2520,2895 2548,2895 ; v3(2560,3385) 2604.86,3385 C22.1@2634.92,3415.06 ; v3(2565,3910) 2609.86,3910 C13.1@2634.92,3935.06 ; C32.1@2625.08,2664.94 2724.94,2664.94 2794,2734 2817,2734 ; C23.1@2685.08,3184.94 2784.94,3184.94 2795.88,3174 v3(2798,3174) ; C14.1@2705.08,3704.94 v2@2775,3704.94 ; 2830,2734 2817,2734 ; v3(2865,2731) 2862,2734 2817,2734 ; v3(2950,3530) 2975.06,3504.94 C158.2@3015.08,3504.94 ; v3(3010,3965) 3010.06,3964.94 C92.2@3075.08,3964.94 ; C160.2@3084.92,2995.06 3144.94,2995.06 v3(3160,2980) ; C161.1@3085.08,2704.94 3100.14,2720 v2@3228,2720 ; C159.1@3105.08,3264.94 3171,3199.02 v3@3171,3181 ; C157.1@3165.08,3724.94 3175.02,3715 v3(3240,3715) ; v3(3335,3505) 3344.94,3495.06 C18.1@3394.92,3495.06 ; v3(3345,2995) 3384.94,2955.06 C27.1@3414.92,2955.06 ; U6.33@3658.72,3863.23 3705.08,3909.59 C9.1@3705.08,4104.94 3705.08,4164.92 v3(3705,4165) ; U8.4@4134.49,3958 4195,3958 ; C17.2@4195,3844.21 4195,3958 ; C15.2@4275.06,3975.08 4257.98,3958 4195,3958 ; 2548,2895 2548.06,2895.06 C31.1@2594.92,2895.06 2594.86,2895 2548,2895
  other v2: 2780,3703
  other v3: 2210,3820 2270,3855
  other v4: 4001,3033 4029,3033 3973,3037 3999,3055 4028,3059 3971,3074 4001,3079 4029,3087 3972,3106 3999,3110 4028,3118 3972,3138 3998,3140 4028,3144 4000,3169 4030,3171 3985,3592 3958,3601 3986,3621 3957,3631 3984,3650 3956,3663 3986,3680 3986,3711 3958,3728 3987,3745
BOOT0: T13.1 U16.60 | length 482.6
  Top Layer w8: v2@7675,3045 7681.58,3051.58 U16.60@7857.17,3051.58
  Bottom Layer w8: v2(7675,3043) 7675,3307.55 T13.1@7698.48,3331.03
CFG_1A: R17.2 U18.A18 | length 836.9
  Top Layer w8: R17.2@4093.46,4020 4209,4020 4374,3855 4690,3855 ; 4765,3855 4690,3855 ; U18.A18@4786.61,3855.91 4785.71,3855 4690,3855
CFG_2A: R34.2 U18.A9 | length 801.5
  Top Layer w8: R34.2@4093.46,3435 4191,3435 4211,3455 4213,3455 ; 4213,3457 4635.38,3457 4678.38,3500 ; 4760,3500 4678.38,3500 ; U18.A9@4786.61,3501.57 4785.04,3500 4678.38,3500
CFG_3A: R51.2 U18.B3 | length 946.6
  Top Layer w6: R51.2@4093.46,2865 4098.33,2865 4225,2991.67 4225,3074 4363,3212 4701.8,3212 4734.8,3245 4805.63,3245 U18.B3@4825.98,3265.35
CMD_BUS: R104.2 U18.AB3 | length 336.5
  Top Layer w6: U18.AB3@5613.39,3265.35 5661.18,3265.35 5661.54,3265 ; 5635,3265 5661.54,3265 ; R104.2@5846.54,3080 5668.27,3258.27 5661.54,3265
CTRX_N: P1.3 R2.2 U2.11 | length 4749.4
  Top Layer w20: v3(6239,3190) U2.11@6323.78,3190
  VCC w20: P1.3@1897,3195 1897,3185 2109,2973 2248,2973 2289,2932 4252.57,2932 4341.57,3021 5979.57,3021 6138.57,3180 6229,3180 v3(6239,3190)
  Bottom Layer w20: P1.3@1897,3195 1970.94,3195 R2.2@1990.02,3175.92
CTRX_P: P1.4 R2.1 U2.12 | length 4710.4
  Top Layer w20: v3(6242,3140) U2.12@6323.78,3140
  VCC w20: P1.4@1897,3095 1944.57,3095 2096.57,2943 2235.57,2943 2276.57,2902 4265,2902 4354,2991 5992,2991 6151,3150 6232,3150 v3(6242,3140)
  Bottom Layer w20: P1.4@1897,3095 1906.08,3085.92 R2.1@1990.02,3085.92
CTRY_N: P2.6 R4.2 U24.10 | length 3043.9
  Top Layer w20: U24.10@7016.22,3140 v2@7163,3140
  VCC w20: v2(7159,3140) 7169.5,3129.5 7267.43,3129.5 7463.93,2933 9483,2933 P2.6@9734,3184
  Bottom Layer w20: P2.6@9734,3184 9771.08,3146.92 R4.2@9851.02,3146.92
CTRY_P: P2.5 R4.1 U24.9 | length 3040.1
  Top Layer w20: U24.9@7016.22,3090 7084,3090 ; 7112,3090 7084,3090 ; v2@7164,3091 7163,3090 7084,3090
  VCC w20: v2(7159,3089) 7169.5,3099.5 7255,3099.5 7451.5,2903 9495.43,2903 9676.43,3084 P2.5@9734,3084
  Bottom Layer w20: P2.5@9734,3084 9761.08,3056.92 R4.1@9851.02,3056.92
DATA_AX_N: P2.7 R107.1 U24.11 | length 7770.1
  Top Layer w20: U24.11@7016.22,3190 v2(7159,3190)
  VCC w20: v2(7159,3190) 7169,3200 7285,3200 7509,2976 ; 7509,2976 9368.43,2976 ; 7509,2976 9368.43,2976 ; 7509,2976 9368.43,2976 ; 9368.43,2976 9676.43,3284 ; 9368.43,2976 9676.43,3284 ; 9368.43,2976 9676.43,3284 ; 9676.43,3284 P2.7@9734,3284 ; 9676.43,3284 P2.7@9734,3284 ; 9676.43,3284 P2.7@9734,3284
  Bottom Layer w20: P2.7@9734,3284 9738.08,3279.92 R107.1@9855.02,3279.92
DATA_AX_P: P2.8 R107.2 U24.12 | length 3098.1
  Top Layer w20: U24.12@7016.22,3240 v2(7157,3240)
  VCC w20: v2(7157,3240) 7167,3230 7297.43,3230 7521.43,3006 9356,3006 P2.8@9734,3384
  Bottom Layer w20: P2.8@9734,3384 9840.94,3384 R107.2@9855.02,3369.92
DATA_AY_N: P1.2 R101.1 U2.10 | length 4708.5
  Top Layer w20: v3(6239,3240) U2.10@6323.78,3240
  VCC w20: P1.2@1897,3295 1954.57,3295 2028.57,3221 4243.57,3221 4404.57,3060 5909.5,3060 6100,3250.5 6228.5,3250.5 v3(6239,3240)
  Bottom Layer w20: P1.2@1897,3295 1906.92,3304.92 R101.1@1994.02,3304.92
DATA_AY_P: P1.1 R101.2 U2.9 | length 4733.8
  Top Layer w20: v3(6238,3291) 6239,3290 U2.9@6323.78,3290
  VCC w20: P1.1@1897,3395 1907.21,3384.79 2041,3251 4256,3251 4417,3090 5897.07,3090 6087.57,3280.5 6227.5,3280.5 v3(6238,3291)
  Bottom Layer w20: P1.1@1897,3395 1897.08,3394.92 R101.2@1994.02,3394.92
DATA_BX_N: P2.3 R114.1 U23.11 | length 2899.6
  Top Layer w20: U23.11@7016.22,2780 7081,2780 v2(7082,2779)
  VCC w20: v2(7082,2779) 7127,2824 9616.43,2824 9676.43,2884 P2.3@9734,2884
  Bottom Layer w20: P2.3@9734,2884 9782.08,2835.92 R114.1@9852.02,2835.92
DATA_BX_P: P2.4 R114.2 U23.12 | length 2929.1
  Top Layer w20: U23.12@7016.22,2830 7086,2830 v2@7087,2829
  VCC w20: v2(7082,2830) 7106,2854 9604,2854 P2.4@9734,2984
  Bottom Layer w20: P2.4@9734,2984 9793.94,2984 R114.2@9852.02,2925.92
DATA_BY_N: P1.6 R42.1 U1.10 | length 4810.4
  Top Layer w20: v2@6244,2829 6245,2830 U1.10@6323.78,2830
  VCC w20: P1.6@1897,2895 1955,2837 1955,2806.57 2101.57,2660 4141,2660 4397,2916 5511.57,2916 5617.57,2810 6104,2810 6123,2829 v2(6248,2829)
  Bottom Layer w20: P1.6@1897,2895 1924.08,2867.92 R42.1@1992.02,2867.92
DATA_BY_P: P1.5 R42.2 U1.9 | length 4885.6
  Top Layer w20: v2@6249,2880 U1.9@6323.78,2880
  VCC w20: P1.5@1897,2995 1985,2907 1985,2819 2114,2690 4128.57,2690 4384.57,2946 5524,2946 5630,2840 6091.57,2840 6110.57,2859 6228.5,2859 6249.5,2880 v2(6253,2880)
  Bottom Layer w20: P1.5@1897,2995 1954.94,2995 R42.2@1992.02,2957.92
DGND: C1.1 C2.1 C3.2 C4.2 C6.2 C7.2 C39.1 C40.1 C41.1 C42.1 C43.1 C44.1 C47.2 C48.2 C49.2 C50.2 C51.2 C52.2 C53.2 C54.1 C55.1 C56.1 C57.1 C58.2 C59.2 C60.1 C61.1 C62.1 C63.1 C64.1 C65.1 C66.1 C67.1 C68.1 C69.1 C70.1 C71.1 C72.1 C73.1 C74.1 C75.1 C76.1 C77.1 C78.1 C79.1 C80.1 C81.1 C82.1 C85.1 C86.1 C87.1 C88.1 C90.1 C91.2 C93.1 C94.1 C95.1 C97.1 C98.1 C100.1 C101.1 C102.1 C103.1 C104.1 C106.1 C107.1 C108.1 C109.1 C111.1 C112.2 C113.2 C114.2 C116.2 C118.2 C119.2 C120.1 C121.1 C122.1 C123.1 C124.1 C125.1 C126.1 C127.1 C128.1 C129.1 C130.1 C131.1 C132.1 C133.1 C134.1 C135.2 C136.1 C137.1 C138.2 C139.2 C140.1 C141.1 C142.1 C144.1 C145.1 C153.1 C154.2 C155.2 C156.1 D7.2 D8.1 J1.2 J1.10 J2.4 JP1.4 P7.4 P8.4 pad.0@6466.23,3802.28 pad.0@6503.23,3841.28 pad.1@6538.62,3802.84 pad.2@6465.23,3876.28 pad.3@6539.23,3876.28 pad.4@6459.23,3839.28 pad.5@6502.23,3797.28 pad.6@6547.23,3839.28 pad.7@6501.23,3886.28 R7.2 R66.2 R68.2 R78.1 R79.1 R80.2 R91.2 R97.2 R99.2 R100.1 R113.2 R115.1 R119.1 R125.2 T22.1 T23.1 U1.1 U1.3 U1.6 U1.7 U2.1 U2.3 U2.6 U2.7 U3.1 U16.12 U16.18 U16.31 U16.47 U16.63 U18.A1 U18.A22 U18.AA2 U18.AA22 U18.AB1 U18.AB22 U18.C5 U18.C9 U18.C11 U18.C12 U18.C14 U18.C16 U18.D3 U18.E10 U18.E18 U18.E20 U18.F3 U18.F5 U18.F12 U18.F16 U18.G2 U18.G9 U18.G11 U18.G13 U18.G15 U18.G17 U18.G20 U18.H8 U18.H10 U18.H12 U18.H13 U18.H14 U18.H16 U18.J9 U18.J15 U18.K3 U18.K7 U18.K10 U18.K11 U18.K12 U18.K13 U18.K16 U18.L8 U18.L10 U18.L11 U18.L12 U18.L13 U18.L15 U18.L20 U18.M7 U18.M10 U18.M11 U18.M12 U18.M13 U18.N3 U18.N8 U18.N10 U18.N11 U18.N12 U18.N13 U18.N15 U18.N17 U18.P6 U18.P8 U18.P16 U18.P19 U18.R7 U18.R9 U18.R11 U18.R13 U18.T8 U18.T10 U18.T12 U18.T14 U18.U3 U18.U5 U18.U7 U18.U13 U18.V6 U18.V18 U18.V20 U18.W3 U18.Y5 U18.Y9 U18.Y11 U18.Y12 U18.Y16 U18.Y18 U18.Y20 U19.2 U20.10 U21.1 U21.2 U21.3 U21.4 U21.7 U22.2 U22.7 U22.13 U22.26 U22.31 U22.33 U23.1 U23.6 U23.7 U24.1 U24.6 U24.7 U28.3 U28.5 | length 16578.6
  Top Layer w6: v1(4730,3185) 4731.61,3186.61 U18.A1@4786.61,3186.61 ; v1(4785,4045) 4785,4015 U18.A22@4786.61,4013.39 ; v1(4845,3325) 4846.26,3325 U18.C5@4865.35,3344.09 ; v1(4845,3480) 4845,3481.22 U18.C9@4865.35,3501.57 ; v1(4845,3680) 4846.93,3680 U18.C14@4865.35,3698.43 ; v1(4845,3755) 4865.35,3775.35 U18.C16@4865.35,3777.17 ; U18.C11@4865.35,3580.32 4864.68,3580.32 v1(4845,3600) 4845.67,3600 U18.C12@4865.35,3619.69 ; v1(4885,3245) 4885,3245.63 U18.D3@4904.72,3265.35 ; v1(4925,3520) 4925,3521.85 U18.E10@4944.09,3540.94 ; v1(4925,3835) 4925,3836.81 U18.E18@4944.09,3855.91 ; v1(4925,3955) 4925,3953.74 U18.E20@4944.09,3934.65 ; v1(4965,3245) 4983.46,3263.46 U18.F3@4983.46,3265.35 ; v1(4965,3325) 4965,3325.63 U18.F5@4983.46,3344.09 ; v1(4965,3600) 4965,3601.22 U18.F12@4983.46,3619.69 ; U18.F16@4983.46,3777.17 v1(5003.65,3797.35) U18.G17@5022.83,3816.54 U18.H16@5062.2,3777.17 ; v1(5002,3718) 5003.04,3718 5005.04,3720 U18.G15@5022.83,3737.8 ; v1(5005,3205) 5005,3208.15 U18.G2@5022.83,3225.98 ; v1(5005,3480) 5001.26,3480 U18.G9@5022.83,3501.57 v1(5043.13,3521.87) U18.H10@5062.2,3540.94 ; v1(5005,3560) 5005,3562.48 U18.G11@5022.83,3580.32 ; v1(5005,3640) 5022.83,3657.83 U18.G13@5022.83,3659.06 U18.H13@5062.2,3659.06 ; v1(5042,3443) 5042,3444 5060.2,3462.2 U18.H8@5062.2,3462.2 ; U18.H12@5062.2,3619.69 U18.H13@5062.2,3659.06 ; v1(5081.89,3718.11) v1@5079.39,3715.61 ; U18.J9@5101.57,3501.57 U18.K10@5140.94,3540.94 ; U18.J15@5101.57,3737.8 v1@5079.39,3715.61 ; v1(5122,3245) 5122,3246.41 U18.K3@5140.94,3265.35 ; U18.K7@5140.94,3422.83 v1@5161.06,3442.95 ; U18.K16@5140.94,3777.17 v1(5161.56,3756.55) U18.L15@5180.31,3737.8 ; v1(5163,3441) v1@5161.06,3442.95 ; U18.L8@5180.31,3462.2 v1@5161.06,3442.95 ; U18.L20@5180.31,3934.65 5180.65,3934.65 v1(5200,3954) ; U18.M7@5219.69,3422.83 v1(5238.93,3442.07) U18.N8@5259.06,3462.2 U18.P8@5298.43,3462.2 ; v1(5239,3837) 5239,3835 5240.59,3835 U18.N17@5259.06,3816.54 ; v1(5240,3284) 5240.41,3284 U18.N3@5259.06,3265.35 ; U18.N12@5259.06,3619.69 U18.N12@5257,3617.63 ; U18.N13@5259.06,3659.06 U18.N13@5257,3657 ; U18.N15@5259.06,3737.8 5259.06,3738.06 v1(5279,3758) ; v1(5279,3365) 5280,3364 5280,3365.04 U18.P6@5298.43,3383.46 ; v1(5280,3878) 5281.15,3878 U18.P19@5298.43,3895.28 ; U18.P16@5298.43,3777.17 5299.17,3777.17 v1(5319,3797) ; U18.R7@5337.8,3422.83 5339.83,3422.83 v1(5358,3441) ; U18.R9@5337.8,3501.57 5357,3520.78 v1(5357,3521) ; U18.R11@5337.8,3580.32 5355.48,3598 5357,3598 v1(5357,3599) ; U18.R13@5337.8,3659.06 5357.74,3679 v1(5358,3679) ; U18.T8@5377.17,3462.2 5396.96,3482 v1(5398,3482) ; U18.T10@5377.17,3540.94 5396,3559.78 5396,3560 v1(5397,3561) ; U18.T12@5377.17,3619.69 5377.69,3619.69 v1(5397,3639) ; U18.T14@5377.17,3698.43 5396.74,3718 v1(5397,3718) ; v1(5400,3245) 5416.54,3261.54 U18.U3@5416.54,3265.35 ; U18.U5@5416.54,3344.09 5436.63,3324 v1(5437,3324) ; U18.U7@5416.54,3422.83 5435.7,3442 v1(5436,3442) ; U18.U13@5416.54,3659.06 5417.06,3659.06 v1(5437,3679) ; U18.V18@5455.91,3855.91 5457.09,3855.91 5475,3838 v1(5475,3836) ; U18.V20@5455.91,3934.65 5475,3953.74 5475,3954 v1(5476,3954) ; U18.V6@5458.46,3383.46 U18.V6@5455.91,3383.46 5474.75,3402.31 5513.69,3402.31 v1(5514,3402) ; U18.W3@5495.28,3265.35 5514,3246.63 v1(5514,3246) ; v1(5515,3364) 5515,3362 5516.74,3362 U18.Y5@5534.65,3344.09 ; U18.Y9@5534.65,3501.57 5553,3519.93 v1(5553,3521) ; U18.Y11@5534.65,3580.32 5555,3600.67 v1(5555,3601) ; U18.Y12@5534.65,3619.69 5554,3639.04 v1(5554,3640) ; U18.Y16@5534.65,3777.17 5535.17,3777.17 v1(5554,3796) ; U18.Y18@5534.65,3855.91 5553.74,3875 5554,3875 v1(5554,3876) ; U18.Y20@5534.65,3934.65 5534.65,3935.65 v1(5555,3956) ; v1(5554,3206) v1@5555,3207 ; v1@5555.03,3207 U18.AA2@5574.02,3225.98 ; U18.AA22@5574.02,4013.39 U18.AB22@5613.39,4013.39 v1(5635,4035) ; U18.AB1@5613.39,3186.61 5613.39,3152.61 v1(5629,3137) ; U18.H13@5062.2,3659.06 U18.H14@5062.2,3698.43 v1@5079.39,3715.61 ; U18.K10@5140.94,3540.94 v1(5161,3561) v1(5200,3600) ; U18.K10@5140.94,3540.94 U18.K11@5140.94,3580.32 ; U18.K11@5140.94,3580.32 U18.M13@5219.69,3659.06 ; U18.K11@5140.94,3580.32 U18.K12@5140.94,3619.69 U18.L12@5180.31,3619.69 ; U18.L12@5180.31,3619.69 v1(5161.11,3638.89) U18.K13@5140.94,3659.06 U18.L13@5180.31,3659.06 U18.M13@5219.69,3659.06 ; U18.L12@5180.31,3619.69 v1(5200,3600) ; U18.L12@5180.31,3619.69 U18.L11@5180.31,3580.32 U18.L10@5180.31,3540.94 U18.M11@5219.69,3580.32 U18.N12@5257,3617.63 ; U18.L12@5180.31,3619.69 U18.M12@5219.69,3619.69 ; v1(5200,3600) v1(5237.93,3562.07) U18.N10@5257,3543 ; v1(5200,3600) U18.M12@5219.69,3619.69 ; U18.M12@5219.69,3619.69 v1(5238.97,3638.97) U18.N13@5257,3657 ; U18.M12@5219.69,3619.69 U18.M10@5219.69,3540.94 U18.N10@5259.06,3540.94 U18.N10@5257,3543 ; U18.M13@5219.69,3659.06 5255.94,3659.06 5257,3658 U18.N13@5257,3657 ; U18.N10@5257,3543 U18.N12@5257,3617.63 ; U18.N12@5257,3617.63 U18.N13@5257,3657
  Top Layer w8: v3(4212,2847) 4226.5,2832.5 4234,2832.5 ; C41.1@4260,2698.5 4211,2747.5 4211,2822 4221.5,2832.5 4234,2832.5 ; C43.1@4260,2832.5 4234,2832.5 ; v2(4696,2674) 4701,2669 U20.10@4763.96,2669 4818.5,2669 C44.1@4890,2740.5 ; C42.1@4890,2873.5 4939,2824.5 4939,2789.5 C44.1@4890,2740.5 ; J1.10@5009,2665 4965.5,2665 C44.1@4890,2740.5 ; v2@8141,3060 8146.54,3054.46 U16.12@8146.54,2900 ; U16.18@8298.11,2992.52 8347.52,2992.52 8370,3015 v2@8370,3044 ; U16.31@8298.11,3248.43 v2@8372,3248.43
  Top Layer w10: v3(6185,3720) 6186.54,3721.54 R91.2@6186.54,3760 ; U22.26@6452.57,3728.01 6452.57,3790.63 pad.0@6503.23,3841.28 ; U22.13@6491.94,3956.35 6491.94,3852.57 pad.0@6503.23,3841.28 ; U22.31@6551,3728.01 6551,3793.51 pad.0@6519.76,3824.76 ; U22.2@6615.76,3792.97 6551.54,3792.97 pad.0@6519.76,3824.76 ; U22.7@6615.76,3891.39 6614.59,3890.22 6552.16,3890.22 pad.0@6503.23,3841.28 ; U16.63@7857.17,2992.52 7942.52,2992.52 7978,3028 ; v3(7945,3255) 7949.69,3259.69 U16.47@7949.69,3340.95 ; 7985,3035 7978,3028 ; v2@7986,3063 7986,3036 7978,3028 ; R119.1@9119,2995.5 9119,3017 9163,3061 v2@9175,3061 ; pad.0@6503.23,3841.28 pad.0@6519.76,3824.76
  Top Layer w12: U18.G20@5022.83,3934.65 5027.65,3934.65 v1(5044,3951)
  Top Layer w20: R7.2@4073.29,3674.23 4172.6,3574.92 C54.1@4195.06,3574.92 4195.06,3568.94 v1(4226.15,3537.85) v1(4238,3526) ; v1(4558,3610) 4559,3609 4558.37,3608.37 U19.2@4558.37,3550.9 ; v1(4620,4057) 4620,4016.5 C156.1@4621.5,4015 ; R78.1@5230,2978.5 5359,2849.5 5359,2715 J1.2@5409,2665 ; C144.1@6064.94,4145.08 6114.92,4145.08 v3(6115,4145) ; v3(6155,3480) 6156,3479 C112.2@6194.01,3479 ; v3(6235,3480) 6234,3479 C112.2@6194.01,3479 ; R100.1@6340,3568.5 6339.5,3568 6273,3568 6194.01,3489.01 C112.2@6194.01,3479 ; v3(6395,4185) 6415.99,4205.99 C139.2@6439,4205.99 ; v3(6480,3140) U2.3@6560,3140 ; U1.1@6560,2630 6680,2630 ; U1.3@6560,2730 v3@6620,2730 ; U1.6@6560,2880 U1.7@6560,2930 6665,2930 U23.1@6780,2930 ; U2.1@6560,3040 U24.7@6780,3040 ; U2.6@6560,3290 U2.7@6560,3340 U24.1@6780,3340 ; R97.2@6593.46,4200 6595,4200 6602,4193 v3(6623,4193) ; v3(6710,2695) 6680,2665 6680,2655 6680,2630 ; R99.2@6733.46,4080 6733.46,4058.54 v3(6765,4027) ; U23.6@6780,2680 U23.7@6780,2630 6680,2630 ; U24.6@6780,3090 U24.7@6780,3040 ; v3(6860,3040) U24.7@6780,3040 ; v3(6980,3865) 6979,3866 C116.2@6979,3905.99 6979,3959 v3(6980,3960) ; v2(9252,3050) 9252,3106.5 C87.1@9256.5,3111 ; v2@9373,2637 9373.46,2637.46 C154.2@9373.46,2679 ; C153.1@9521,3121.5 9571.5,3121.5 v2@9572,3121 ; R115.1@9524,2990.5 9584.5,2930 v2@9592,2930
  Top Layer w40: v3(7085,4005) 7085,3922 7207.07,3799.93 D7.2@7256.64,3799.93 ; C155.2@7853,3701 7946,3701 v2@7948,3703 ; v2(8463,3604) 8481.55,3622.55 8481.55,3654 ; U3.1@8481.55,3722.14 8481.55,3654 ; v2@8490,3588 8481.55,3596.45 8481.55,3654
  Top Layer w50: v2@7928,3916 7927,3917 7927,4008 7940.14,4021.14 U28.3@8005,4021.14 v2@7943.14,4021.14 ; v2@7956,4155 U28.5@8005,4155 ; v2@8205,4093 D8.1@8205,4145 v2@8247,4145
  Bottom Layer w6: v1(4698,3441) 4698,3444.17 C121.1@4737.56,3483.73 ; v1(4734,3565) 4738,3561 C60.1@4817.56,3561 ; C67.1@4737.56,3341 4723,3326.44 v1(4723,3300) 4742,3281 C56.1@4797.56,3281 ; v1(4758,3720) 4759,3721 C63.1@4817.56,3721 ; v1(4760,3645) 4760,3641 C62.1@4817.56,3641 ; v1(4805,3797) 4805,3798 4808,3801 C64.1@4837.56,3801 ; C61.1@4837.56,3921 4837.56,3885.44 v1(4846,3877) v1@4847,3878 ; C68.1@4882.44,3979 4911,3979 v1(4926,3994) ; C133.1@5021,4022.44 5049,4022.44 ; R79.1@5033.5,3915 R79.1@5048.5,3900 5048.5,3946.5 v1(5044,3951) ; v1(5049,4048) 5049,4022.44 ; v1(5065,3126) 5079,3140 C132.1@5079,3157.56 ; C107.1@5119,3657.56 5137.68,3638.89 v1(5161.11,3638.89) 5180.33,3638.89 C80.1@5199,3657.56 ; C104.1@5121,3542.44 5142.44,3542.44 v1(5161,3561) 5162.44,3562.44 C81.1@5162.44,3599 ; v1(5196,4042) 5180.56,4042 C66.1@5161,4022.44 5049,4022.44 ; C77.1@5201,3542.44 5220.63,3562.07 v1(5237.93,3562.07) 5261.37,3562.07 C111.1@5281,3542.44 ; C106.1@5201,3842.44 5233.56,3842.44 v1(5239,3837) ; C79.1@5234.56,3601 5234.56,3634.56 v1(5238.97,3638.97) 5260.42,3638.97 C95.1@5279,3657.56 ; C130.1@5239,3157.56 5239,3139 v1@5261,3117 ; v1(5280,3878) 5280,3843.44 C85.1@5281,3842.44 ; v1(5356,3837) 5366.44,3837 C101.1@5381,3822.44 ; R80.2@5373.46,3240 5390,3240 5395,3245 v1(5400,3245) ; v1(5464,3136) 5464,3135 5466.56,3137.56 C69.1@5499,3137.56 ; v1(5474,3797) 5474,3787.44 C102.1@5482.44,3779 C102.1@5498,3779 ; C142.1@5482.44,3379 5491,3379 v1(5514,3402) ; C86.1@5482.44,3719 v1(5516,3719) ; C120.1@5602.44,3279 5616,3279 v1(5643,3306)
  Bottom Layer w8: C126.1@4625.08,2779.94 4646,2759.02 C40.1@4646,2691.5 4678.5,2691.5 v2(4696,2674) ; v2(6561,2909) 6561,2902.54 R113.2@6600.54,2863
  Bottom Layer w10: v3(7790,3310) 7791.54,3308.46 C51.2@7791.54,3030 ; v3(7945,3255) C48.2@7945,3301.54 ; v3(8045,3250) C49.2@8045,3301.54 ; v3(8160,3255) C50.2@8160,3301.54 ; U21.7@8505.51,2758 8571,2758 8593,2736 v2@8593,2686
  Bottom Layer w12: C98.1@4917.56,3461 4917.56,3479.56 v1(4924,3486) ; v1(4925,3520) 4926,3521 C90.1@4957.56,3521 ; v1(4926,3994) 4947.61,3994 C141.1@4967.58,3974.02 ; C108.1@4937.56,3681 4937.56,3704.44 v1(4926,3716) 4947.56,3737.56 C100.1@4959,3737.56 ; C97.1@5139,3357.56 C109.1@5379,3357.56 5368.44,3357.56 5357,3369 5356,3368 v1(5356,3367) ; C97.1@5143,3355 C97.1@5145.56,3357.56 ; 5151.56,3357.56 5160,3366 v1(5160,3365) ; v1(5279,3365) 5286.44,3357.56 ; v1(5359,3954) 5389.44,3954 C145.1@5401,3942.44 ; v1(5435,3560) 5436,3561 5462.44,3561 ; C88.1@5442.44,3519 5462.44,3539 5462.44,3561 ; C72.1@5461,3922.44 5461,3939 v1(5476,3954) ; C103.1@5462.44,3599 5462.44,3561 ; v1(5515,3994) 5521,3988 C74.1@5521,3962.44 ; C129.1@5582.44,3459 5582.44,3471.44 v1(5593,3482) ; C127.1@5582.44,3559 5582.44,3586.44 v1(5594,3598) ; C73.1@5582.44,3839 5655,3839 v1(5656,3840) ; v1(5594,3640) 5602.44,3648.44 C65.1@5602.44,3679 C55.1@5602.44,3759 5645.44,3716 v4(5657,3716) ; C134.1@5622.44,3919 5636,3932.56 v1(5636,3953)
  Bottom Layer w20: v1(4238,3526) 4278.64,3485.36 C114.2@4334.57,3485.36 4374.92,3525.71 C78.1@4374.92,3615.06 ; C118.2@4434.57,3835.36 4434.57,3910.57 v1(4449,3925) ; v1(4612,3233) 4613.92,3234.92 C122.1@4644.94,3234.92 ; C125.1@4614.92,3975.06 4620,3980.13 v1(4620,4057) ; v1(4762,3405) 4766,3401 C57.1@4817.56,3401 ; C128.1@4915.06,2765.08 5009,2671.14 J1.10@5009,2665 ; C70.1@4924.25,3157.56 C140.1@4979,3157.56 ; v1(5400,3245) 5427.44,3217.56 C131.1@5439,3217.56 ; C135.2@5525.43,4074.64 5600.64,4074.64 v1(5602,4076) ; v1(5713,3613) 5727.13,3613 C123.1@5755.06,3585.08 ; v2(5731,2901) 5713,2919 5712,2919 5636.36,2994.64 C119.2@5625.43,2994.64 5625.43,3055.41 C124.1@5704.94,3134.92 5744.08,3134.92 v1(5746,3133) ; C136.1@5735.06,4085.08 5735.06,4132.06 v1(5737,4134) ; v3(6115,4145) 6153.5,4106.5 C39.1@6170,4106.5 ; C137.1@6264.94,3754.92 6416.87,3754.92 pad.0@6503.23,3841.28 ; C2.1@6306,3268.08 6306,3291 6345,3330 6445,3330 6503.46,3330 R125.2@6573.46,3260 6610,3260 v3(6650,3300) ; C3.2@6441,3029 6452,3040 v3(6620,3040) ; C93.1@6755.06,3925.08 C94.1@6895.06,3925.08 ; v3(6940,3995) 6895.06,3950.06 C94.1@6895.06,3925.08 ; v3(6980,3960) 6945.08,3925.08 C94.1@6895.06,3925.08 ; C91.2@7085.36,3965.43 7095.79,3955 v3@7160,3955 ; C58.2@7848.46,2646.54 C58.2@7840,2646.54 7879.54,2607 8020.46,2607 8035.63,2622.17 C59.2@8060,2646.54 ; 7985,3035 7986.54,3033.46 ; v2@7985,3064 7986.54,3062.46 7986.54,3033.46 ; C47.2@7986.54,3000 7986.54,3033.46 ; v3(8110,3200) R66.2@8146.54,3200 ; U21.1@8694.49,2808 U21.2@8694.49,2758 U21.3@8694.49,2708 U21.4@8694.49,2658 8694.49,2615.51 v2(8698,2612)
  Bottom Layer w40: C7.2@8254.94,3566.92 8372.02,3684 C6.2@8442,3684
  Bottom Layer w50: C6.2@8442,3684 8463,3663 v2@8463,3611
  other v1: 5258,3118 4966,3157.56 4253,3508 7134,3518 7040,3520 7065,3520 5753,3844 5770,3844 4438,3915 5575,4076 5576,4099 7001,4179 6915,4180 6944,4180 6974,4182
  other v2: 9373,2634 8594,2684 5704,2928 6709,2928 9586,2931 8369,3045 7986,3061 8139,3061 9175,3063 9568,3121.5 8370,3248.43 8490,3589 7942,3663 8019,3669 7982,3671 7940,3699 7978,3701 8019,3702 7980,3735 8018,3736 7940,3737 7926,3910 7924,3946 7925,3982 7939,4021 7974,4021.14 8206,4077 8205,4107 8252,4146 7950,4154
  other v3: 7884,2609 6890,2705 6615,2730 6780,3065 6710,3340 7155,3955 7060,4005 7115,4005
  other v4: 4087,3041 4116,3041 4147,3044 4120,3071 4087,3072 4147,3073 4119,3103 4146,3103 4089,3104 4119,3136 4145,3136 4089,3140 4116,3171 4089,3172 4143,3173 4077,3603 4107,3605 4047,3609 4107,3635 4077,3637 4046,3643 4077,3669 4109,3669 4049,3674 4076,3702 4107,3702 4047,3706 4045,3739 4076,3739 4106,3739
DOUT_1A: R14.2 U18.A17 | length 738.1
  Top Layer w8: R14.2@4093.46,3925 4280,3925 4375,3830 4773.15,3830 U18.A17@4786.61,3816.54
DOUT_2A: R31.2 U18.B9 | length 843.5
  Top Layer w6: 4674.09,3475.91 4680.92,3482.73 4807.14,3482.73 ; 4812.96,3487.96 4807.73,3482.73 4807.14,3482.73 ; U18.B9@4825.98,3501.57 4807.14,3482.73
  Top Layer w8: R31.2@4093.46,3345 4160,3345 4193,3378 4213,3398 ; 4240,3425 4213,3398 ; 4674.09,3475.91 4628.18,3430 4245,3430 4213,3398
DOUT_3A: R48.2 U18.B2 | length 1011.2
  Top Layer w6: R48.2@4093.46,2775 4162,2843.54 4162,2908.87 4239,2985.87 4239,3060 4377,3198 4707.6,3198 4715.05,3205.46 4733,3205.46 4805.46,3205.46 ; 4812.66,3212.66 4805.46,3205.46 ; U18.B2@4825.98,3225.98 4805.46,3205.46
FPGA_ASDO: C44.2 U18.D1 U20.15 | length 691.7
  Top Layer w6: C44.2@4890,2805.46 4844,2851.46 4844,2902 4827,2919 U20.15@4763.96,2919 4707,2919 4678,2948 4678,2977 4710,3009 4732,3009 4754,3031 4754,3082 4765,3093 4843,3093 4904.72,3154.72 4904.72,3155 U18.D1@4904.72,3186.61
FPGA_CONF_DONE: R82.2 U18.M18 | length 95.9
  Top Layer w8: U18.M18@5219.69,3855.91 5220.91,3855.91 v1(5240,3875)
  Bottom Layer w8: v1(5240,3875) 5246.54,3881.54 R82.2@5246.54,3940
FPGA_DATA0: R85.1 U18.K1 | length 417.7
  Top Layer w6: R85.1@4786.5,3056 4926,3056 4965,3095 5065,3095 5140.94,3170.94 U18.K1@5140.94,3186.61
FPGA_DCLK: C42.2 U18.K2 U20.16 | length 613.5
  Top Layer w6: U20.16@4763.96,2969 4859.46,2969 C42.2@4890,2938.46 4890,2988.58 4984.42,3083 5088,3083 5140,3135 ; 5135,3130 5140,3135 ; U18.K2@5140.94,3225.98 5140.94,3224.06 5159.79,3205.21 5159.79,3154.79 5140,3135
FPGA_LED1: D15.2 U18.AB18 | length 243.5
  Top Layer w8: U18.AB18@5613.39,3855.91 5697.84,3940.36 D15.2@5821.93,3940.36
FPGA_LED2: D14.2 U18.AB16 | length 218.1
  Top Layer w8: U18.AB16@5613.39,3777.17 5798.73,3777.17 D14.2@5821.93,3800.36
FPGA_LED3: D13.2 U18.AB13 | length 268.6
  Top Layer w8: U18.AB13@5614.69,3660.36 U18.AB13@5613.39,3659.06 5678.44,3594 5762,3594 5821.93,3653.93 D13.2@5821.93,3660.36
FPGA_LED4: U18.AB10 | length 6.4
  Top Layer w8: U18.AB10@5613.97,3540.36 U18.AB10@5613.39,3540.94 U18.AB10@5618.94,3540.94
FPGA_LED5: U18.A6 | length 325.3
  Top Layer w6: 4522,3385 4695,3385 ; 4755,3385 4695,3385 ; U18.A6@4786.61,3383.46 4785.08,3385 4695,3385
FPGA_LED6: U18.A5 | length 251.3
  Top Layer w6: 4544,3365 4725,3365 4765.71,3365 U18.A5@4786.61,3344.09
FPGA_LED7: U18.A4 | length 231.4
  Top Layer w6: 4563,3323.57 4767.77,3323.57 U18.A4@4786.61,3304.72